# EAGLE board Panel Posterior (EAGLE 9.6.2)

Size 130 x 50 mm. Coordinates in mm from the lower left corner, seen from the top.
Outline: 82,20 94,20 arc-90 95,19 95,9 arc-90 94,8 82,8 arc-90 81,9 81,19 arc-90 82,20
Outline: 8,0 arc-90 0,8 0,42 arc-90 8,50 122,50 arc-90 130,42 130,8 arc-90 122,0 8,0
Copper layers (1*16): Top 0.035mm / dielectric 1.5mm / Bottom 0.035mm
Design rules "default": minimum track width 6mil, minimum drill 0.35mm, track to track 6mil, track to pad 6mil, pad to pad 6mil, via to via 6mil, smd to smd 6mil, copper to edge 40mil, drill to drill 6mil, minimum pad ring 10mil, minimum via ring 8mil, stop-mask expansion 4mil, vias tented up to drill 0mil, thermal gap 10mil

## Placement (x,y rotation side)
U$2  LOGO_VDA-3CM  [LOGO_VDA-3CM]  23,10 0 top

## Library data of the parts
U$2 = Frames

## Text on the board
tPlace: USB